# Altium PCB V_11.PcbDoc
Units mm, origin at the board's own origin, x right, y up, seen from the top; angles counter-clockwise.
Board outline 152.4 x 101.6 mm, 2 copper layers (Top Layer, Bottom Layer); 6 components, 9 nets, 74 pads, 11 vias.
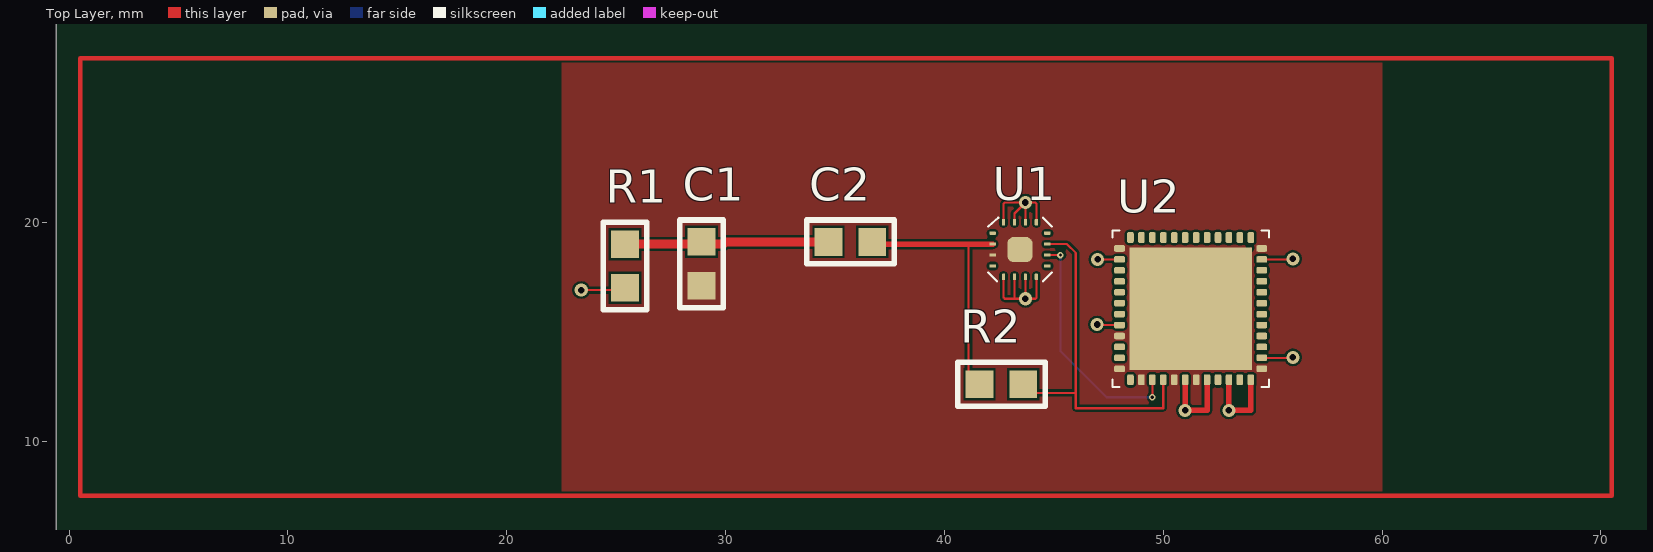
[diagram p0: Top Layer view]
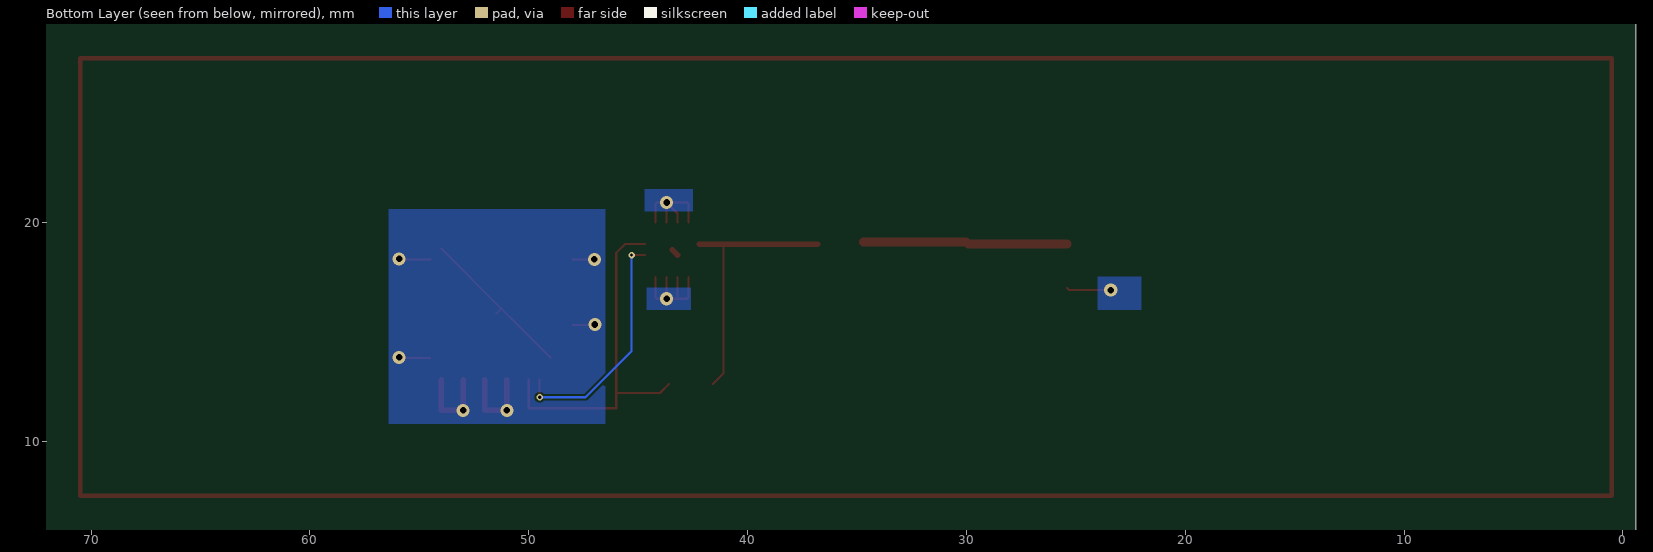
[diagram p1: Bottom Layer view, seen from below]

## Layer stack, top to bottom
Top Solder: solder mask 0.0102, Solder Resist, Dk 3.5
Top Layer: signal copper 0.0356
Dielectric1: core 0.32, FR-4, Dk 4.8
Bottom Layer: signal copper 0.0356
Bottom Solder: solder mask 0.0102, Solder Resist, Dk 3.5

## Board outline
-0.6,-0.6 151.8,-0.6 151.8,101 -0.6,101

## Design rules (kind name [scope] priority, off if disabled: settings)
Clearance [All] p1: gap=0.1 ignorepadtopadclearanceinfootprint=FALSE except(0: Arc-Hole Track-Hole SMDPad-Hole THPad-Hole Via-Hole Fill-Hole Poly-Hole Region-Hole Text-Hole)
MinimumSolderMaskSliver [All] p1: minsoldermaskwidth=0.001
PlaneClearance [All] p1: clearance=0.1
PlaneConnect [All] p1: planeconnectstyle=Direct reliefexpansion=0.508 reliefentries=4 reliefconductorwidth=0.254 reliefairgap=0.254
PolygonConnect [All] p1: connectstyle=Direct reliefconductorwidth=0.254 reliefentries=4 polygonreliefangle="90 Angle" airgapwidth=0.254
RoutingVias [All] p1: holewidth=0.711 width=1.27 viastyle="Through Hole" minholewidth=0.711 minwidth=1.27 maxholewidth=0.711 maxwidth=1.27
ShortCircuit [All] p1: allowed=TRUE
SilkToSilkClearance [All] p1: silktosilkclearance=0.1
SilkToSolderMaskClearance SilkscreenOverComponentPads [IsPad] p1: minsilkscreentomaskgap=0.1 clearancetoexposedcopper=TRUE
SolderMaskExpansion [All] p1: expansion=0.1
Width [All] p1: maxlimit=1 minlimit=0.1 preferedwidth=0.4
24 further rules are at their usual default settings.

## Components (designator, comment, footprint, x,y, rotation, side; value= is the part's Value field where it differs from the comment)
C1 "C" C_0805 28.9,19.1 r270 top
C2 "C" C_0805 34.7,19.1 r0 top
R1 "R" R_0805 25.4,17 r90 top
R2 "R" R_0805 41.6,12.6 r0 top
U1 "ADA4932" ADA4932 42.2,19.5 r0 top
U2 "ADS61849" ADS61B49 48,18.8 r0 top

## Footprints (in the part's own frame and the unit in brackets; to place one, negate y for a bottom-side part, rotate by r counter-clockwise, add the part's x,y. Pads: shape width x height; smd on the part's side, far side on the other; paste and mask are expansions set on the pad)
ADA4932 [mm]
  rrect50% 0.3x0.15 smd: 1(0,0) 2(0,-0.5) 3(0,-1) 4(0,-1.5) 9(2.5,-1.5) 10(2.5,-1) 11(2.5,-0.5) 12(2.5,0)
  rrect50% 0.15x0.3 smd: 5(0.5,-2) 6(1,-2) 7(1.5,-2) 8(2,-2) 13(2,0.5) 14(1.5,0.5) 15(1,0.5) 16(0.5,0.5)
  rrect50% 1.15x1.15 smd: 17(1.25,-0.75)
  silkscreen extent -0.2,-2.2 2.7,0.7
ADS61B49 [mm]
  rrect50% 0.5x0.3 smd: 1(0,0) 2(0,-0.5) 3(0,-1) 4(0,-1.5) 5(0,-2) 6(0,-2.5) 7(0,-3) 8(0,-3.5) 9(0,-4) 10(0,-4.5) 11(0,-5) 12(0,-5.5) 25(6.5,-5.5) 26(6.5,-5) 27(6.5,-4.5) 28(6.5,-4) 29(6.5,-3.5) 30(6.5,-3) 31(6.5,-2.5) 32(6.5,-2) 33(6.5,-1.5) 34(6.5,-1) 35(6.5,-0.5) 36(6.5,0)
  rrect50% 0.3x0.5 smd: 13(0.5,-6) 14(1,-6) 15(1.5,-6) 16(2,-6) 17(2.5,-6) 18(3,-6) 19(3.5,-6) 20(4,-6) 21(4.5,-6) 22(5,-6) 23(5.5,-6) 24(6,-6) 37(6,0.5) 38(5.5,0.5) 39(5,0.5) 40(4.5,0.5) 41(4,0.5) 42(3.5,0.5) 43(3,0.5) 44(2.5,0.5) 45(2,0.5) 46(1.5,0.5) 47(1,0.5) 48(0.5,0.5)
  rect 5.6x5.6 smd: 49(3.25,-2.75)
  silkscreen extent -0.32,-6.32 6.83,0.82
C_0805 [mm]
  rect 1.26x1.27 smd: 4(0,0) 5(2,0)
  silkscreen extent -1,-1 3,1
R_0805 [mm]
  rect 1.26x1.27 smd: 1(0,0) 2(2,0)
  silkscreen extent -1,-1 3,1

## Via types
v1: diameter 0.6, hole 0.3, Top Layer to Bottom Layer, 9 vias
v2: diameter 0.3, hole 0.15, Top Layer to Bottom Layer, 2 vias

## Nets (pads, with @x,y where several pads share a name; then routed paths per layer and width w, separated by ;. In a path a pad name is that pad's centre, name@x,y a point inside that pad or via, vN(x,y) a via of type N, cw(c..) or ccw(c..) an arc to the next point about the centre after c; other vN are vias at no path point)
3.3V: U2.2 U2.8 U2.18 U2.20 U2.22 U2.24 U2.26 U2.35 | length 12.5
  Top Layer w0.1: v1(46.975,15.325) 47,15.3 U2.8 ; v1(47,18.3) U2.2 ; U2.26 55.9,13.8 v1(55.925,13.825) ; U2.35 55.9,18.3 v1(55.925,18.325)
  Top Layer w0.254: U2.18 v1(51,11.4) 52,11.4 U2.20 ; U2.22 v1(53,11.4) 54,11.4 U2.24
+5V: U1.5 U1.6 U1.7 U1.8 | length 5.5
  Top Layer w0.1: U1.5 42.7,16.559 42.759,16.5 43.25,16.5 ; U1.6 43.2,16.55 43.25,16.5 ; U1.7 v1(43.7,16.5) ; U1.8 44.2,16.55 44.15,16.5 v1(43.7,16.5) ; 43.25,16.5 v1(43.7,16.5)
-5V: U1.13 U1.14 U1.15 U1.16 | length 5.2
  Top Layer w0.1: U1.16 42.7,20.841 42.759,20.9 v1(43.7,20.9) ; U1.15 43.2,20.4 v1(43.7,20.9) ; U1.14 v1(43.7,20.9) ; U1.13 44.2,20.85 44.15,20.9 v1(43.7,20.9)
GND: C1.5 U1.3 U1.17 U2.1 U2.9 U2.12 U2.14 U2.17 U2.19 U2.25 U2.36 U2.49 | length 7.8
  Top Layer w0.1: U2.49@49,13.8 50,14.8 50.5,15.3 U2.49 ; U2.49@51.5,15.8 U2.49 ; U2.49@54,18.8 U2.49
  Top Layer w0.254: U1.17@43.2,18.5 U1.17
NetC1_4: C1.4 C2.4 R1.2 | length 9.2
  Top Layer w0.4: R1.2 29.9,19 ; 30,19.1 C2.4
NetC2_5: C2.5 R2.1 U1.2 | length 12
  Top Layer w0.1: 41.1,19 41.1,13.1 R2.1
  Top Layer w0.254: C2.5@36.8,19 41.1,19 U1.2
NetR1_1: R1.1 | length 2
  Top Layer w0.1: v1(23.4,16.9) 25.3,16.9 R1.1
NetR2_2: R2.2 U1.11 U2.16 | length 16.4
  Top Layer w0.1: R2.2 44,12.2 46,12.2 ; U1.11 45.6,19 46,18.6 46,12.2 ; U2.16 50,11.5 46,11.5 46,12.2
NetU1_10: U1.10 U2.15 | length 10.9
  Top Layer w0.1: U1.10 v2(45.3,18.5) ; v2(49.5,12) U2.15
  Bottom Layer w0.1: v2(45.3,18.5) 45.3,14.1 47.4,12 v2(49.5,12)
pads on no net: U1.1 U1.4 U1.9 U1.12 U2.3 U2.4 U2.5 U2.6 U2.7 U2.10 U2.11 U2.13 U2.21 U2.23 U2.27 U2.28 U2.29 U2.30 U2.31 U2.32 U2.33 U2.34 U2.37 U2.38 U2.39 U2.40 U2.41 U2.42 U2.43 U2.44 U2.45 U2.46 U2.47 U2.48
copper on no net: | length 180
  Top Layer w0.2: 0.5,7.5 70.5,7.5 70.5,27.5 0.5,27.5 0.5,7.5

## Polygon pours and split planes (outlines as drawn)
NetR1_1 on Bottom Layer (solid, pour order 18): 22,17.5 24,17.5 24,16 22,16
3.3V on Bottom Layer (solid, pour order 16): 46.5,20.6 46.5,10.8 56.4,10.8 56.4,20.6
+5V on Bottom Layer (solid, pour order 14): 42.6,17 44.6,17 44.6,16 42.6,16
-5V on Bottom Layer (solid, pour order 12): 42.5,21.5 42.5,20.5 44.7,20.5 44.7,21.5
GND on Top Layer (solid, pour order 10): 22.5,27.5 60,27.5 60,7.5 22.5,7.5